# Altium PCB Drone_Powerv2.0.PcbDoc
Units mil, origin at the board's own origin, x right, y up, seen from the top; angles counter-clockwise.
Board outline 3110.24 x 2565.2 mil, 4 copper layers (Top Layer, GND, Power, Bottom Layer), stack 13.956 mil thick; 21 components, 14 nets, 86 pads, 0 vias.
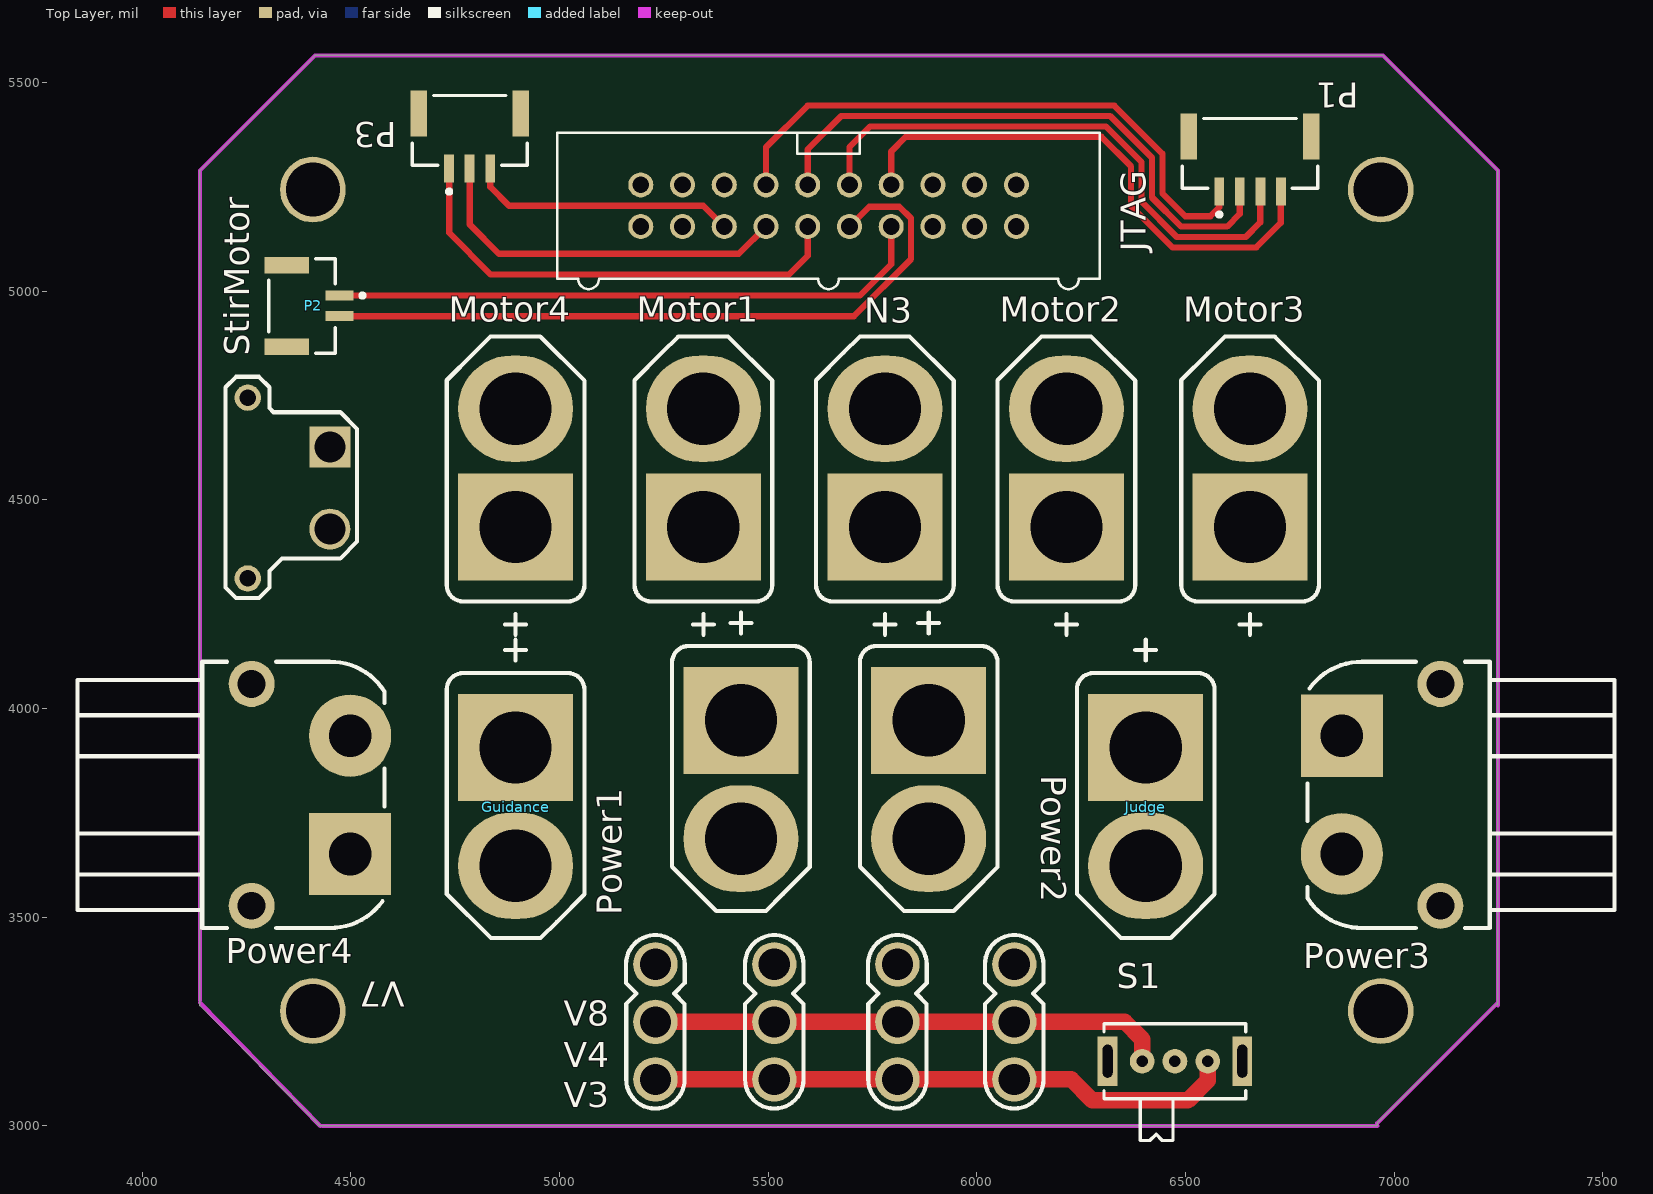
[diagram p0: Top Layer view]
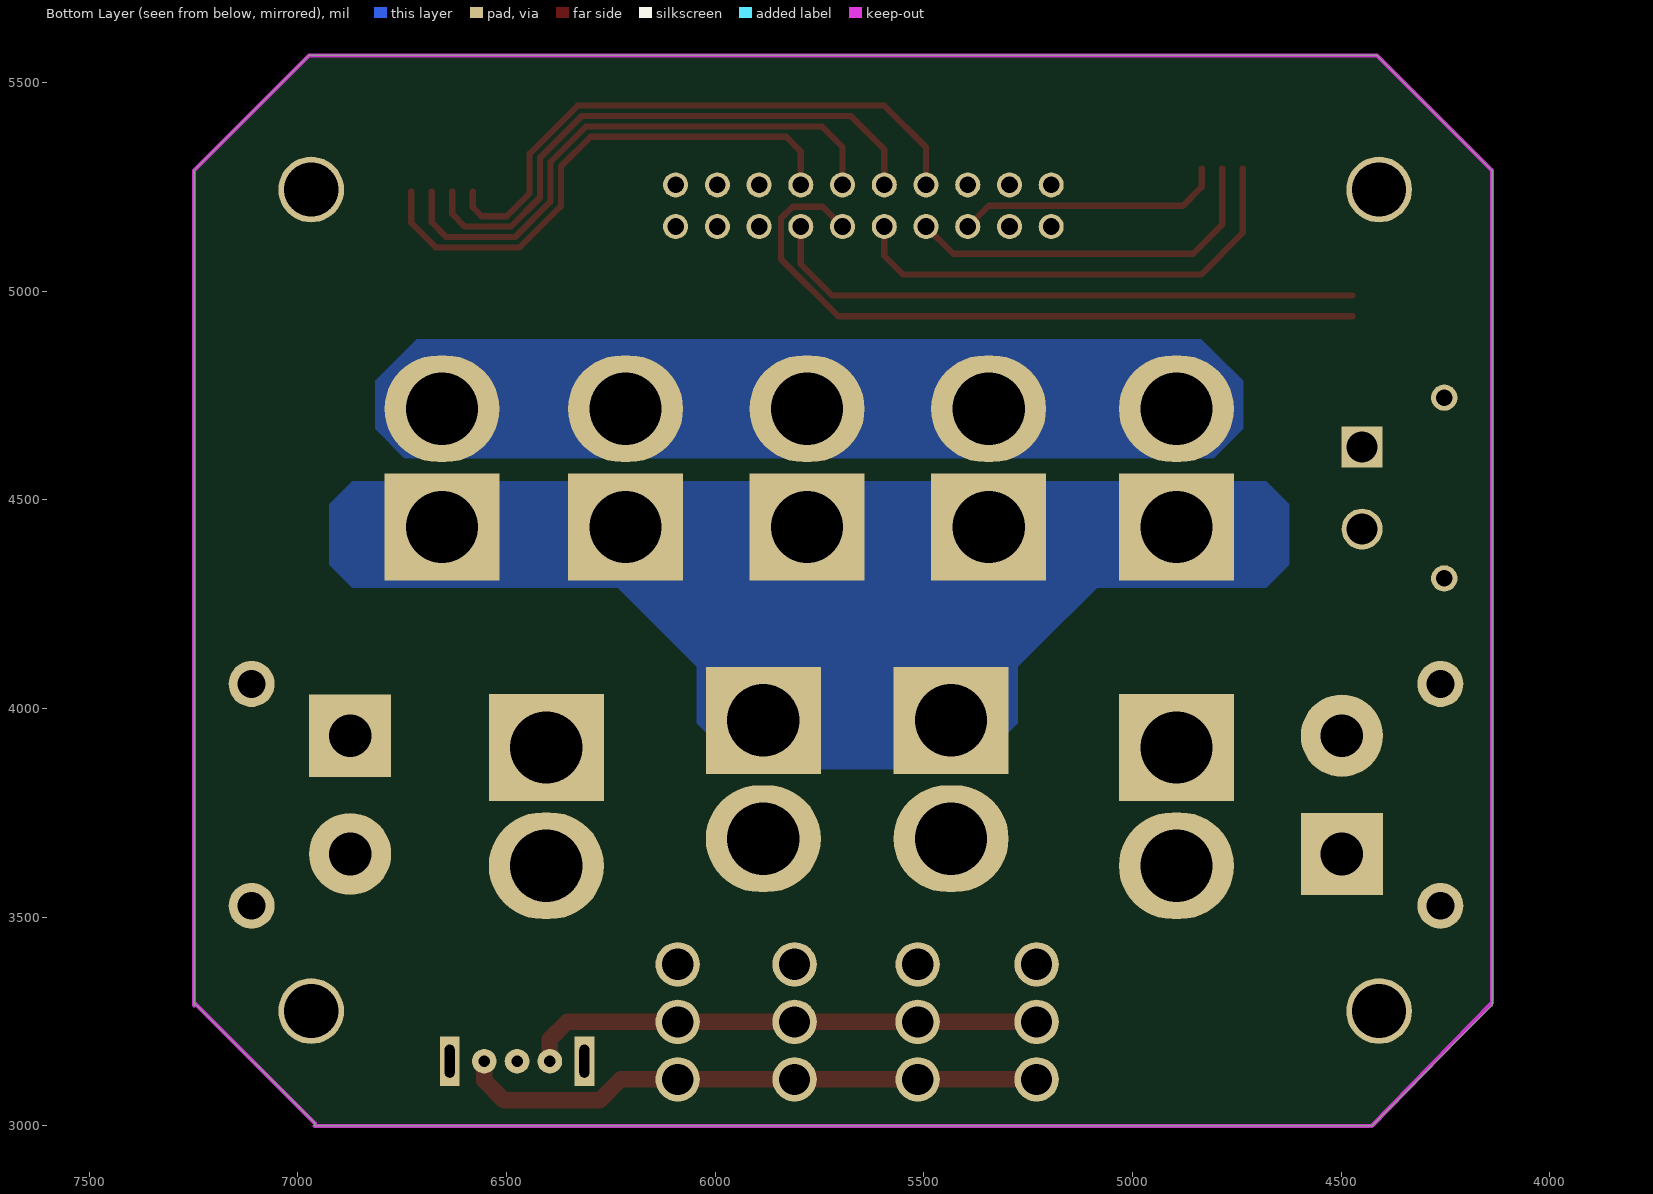
[diagram p1: Bottom Layer view, seen from below]
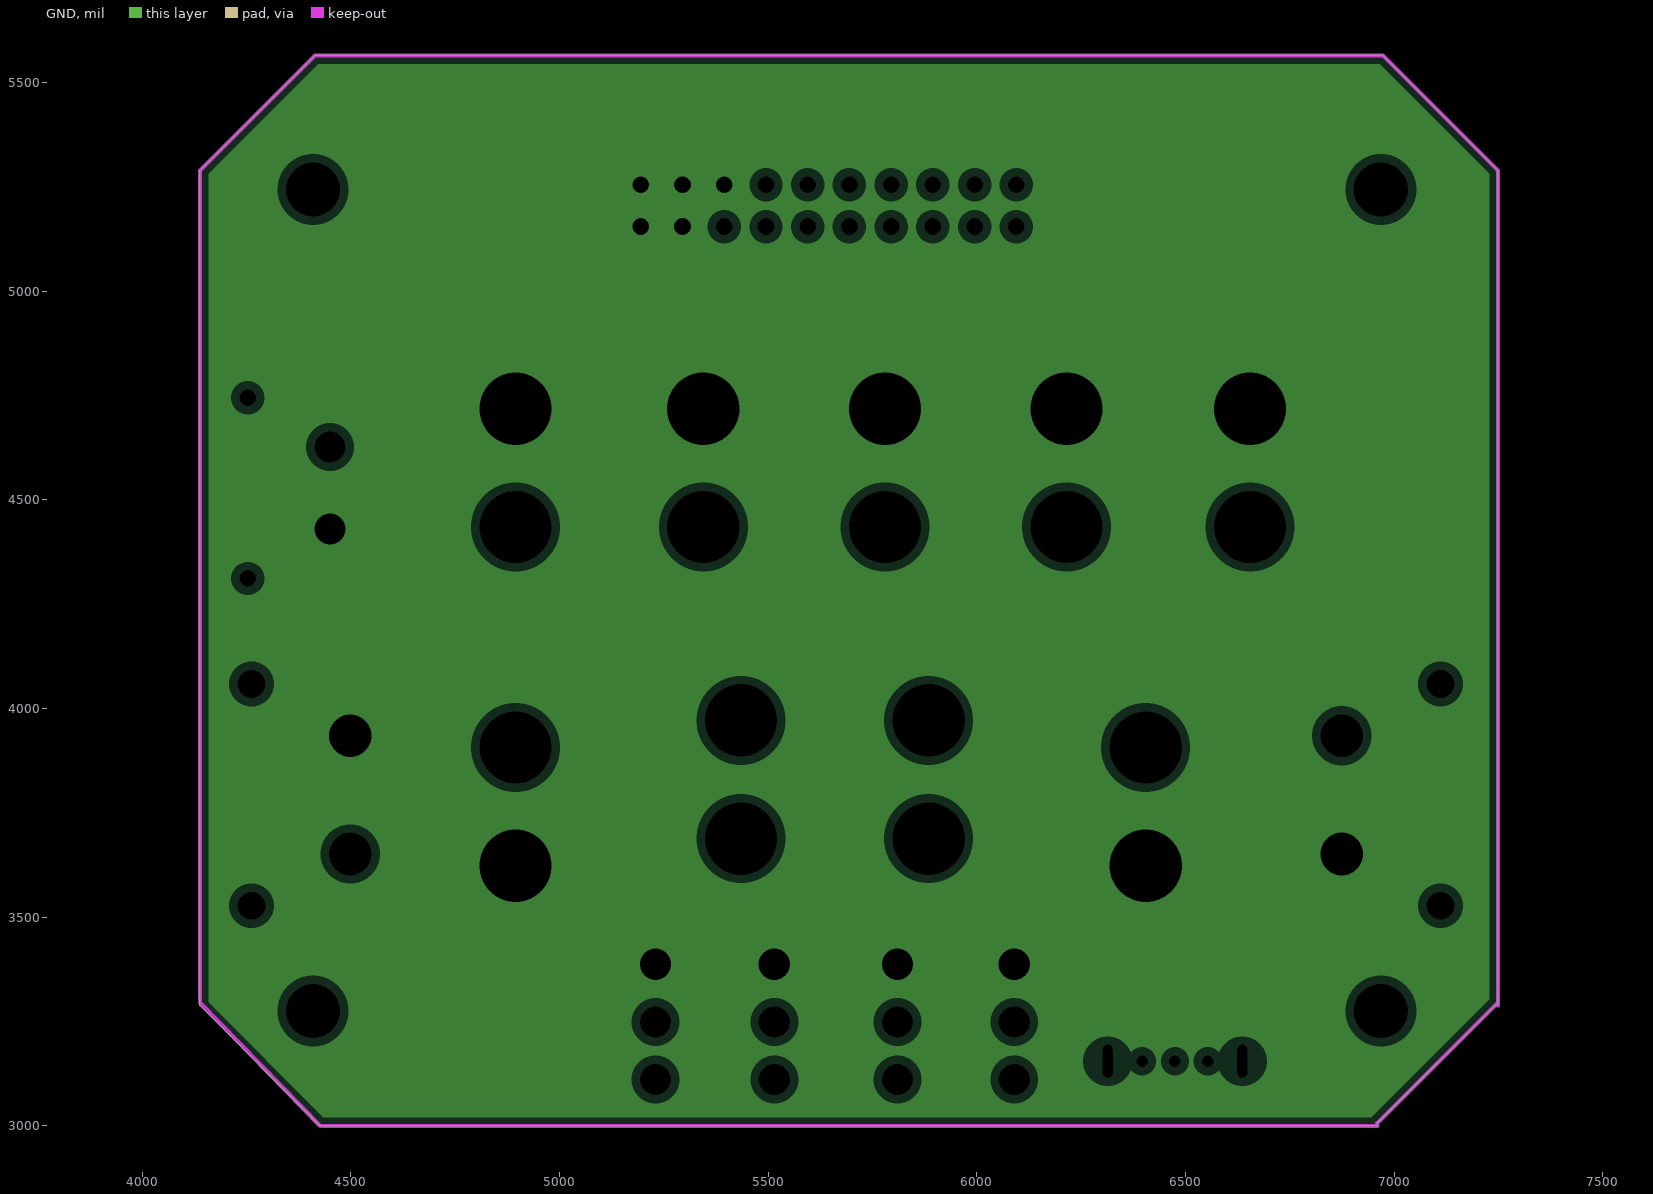
[diagram p2: GND, clearances drawn from the general rule]
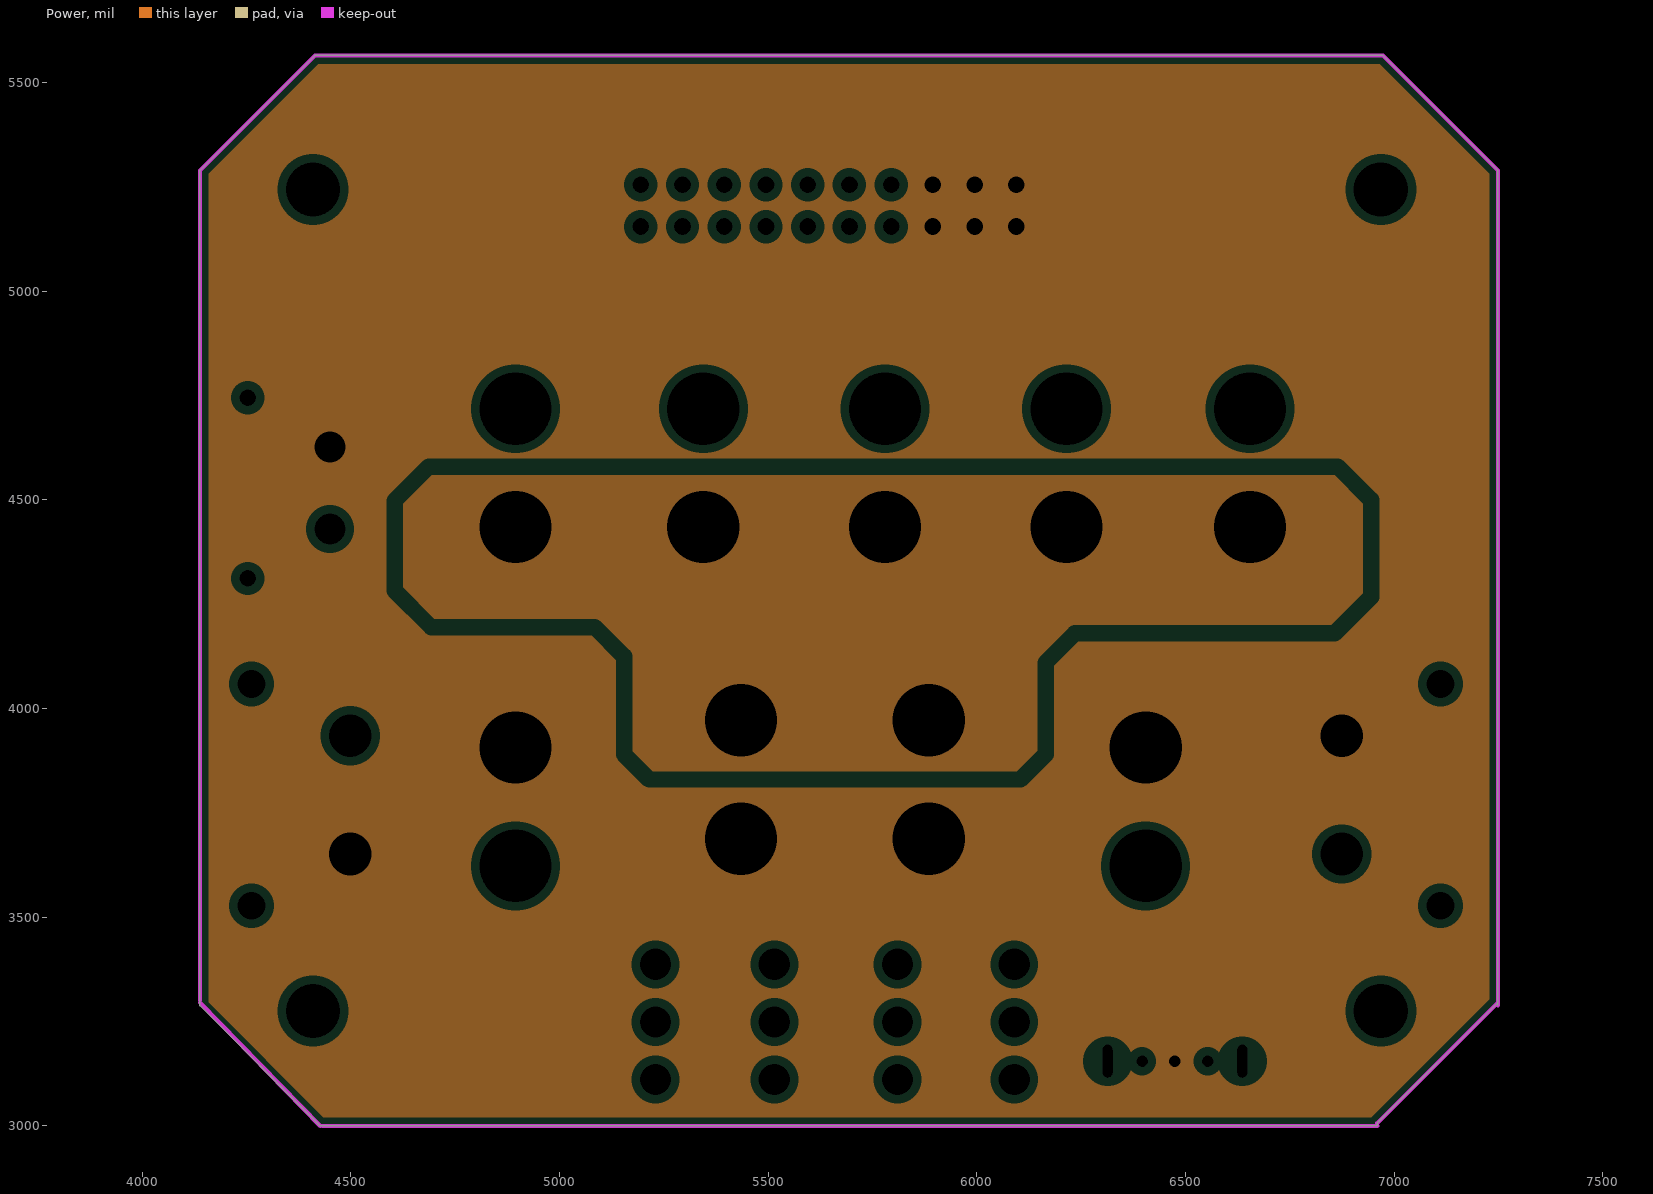
[diagram p3: Power, clearances drawn from the general rule]
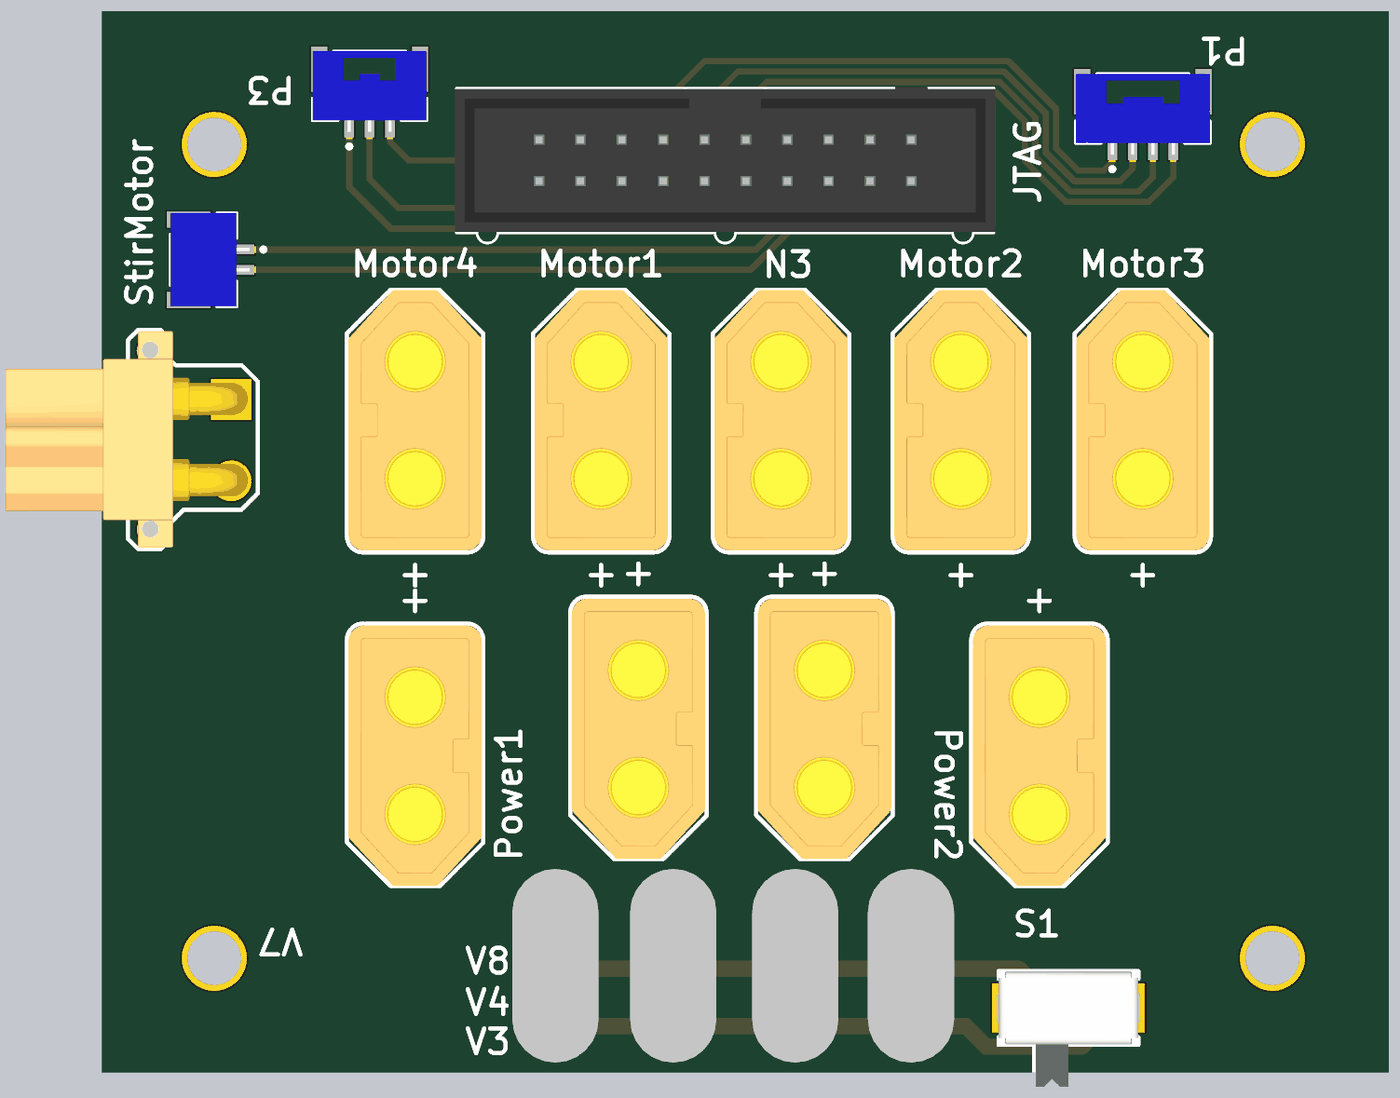
[diagram p4: 3D render of the assembled board from above, using the file's embedded part models]

## Layer stack, top to bottom
Top Layer: signal copper 1.4
Dielectric: prepreg 2.8, PP-006, Dk 4.1
GND: plane copper 1.3779, net GND
Dielectric: prepreg 2.8, PP-006, Dk 4.1
Power: plane copper 1.3779, net (Multiple Nets)
Dielectric: prepreg 2.8, PP-006, Dk 4.1
Bottom Layer: signal copper 1.4

## Board outline
7248.94,3295.65 6960,3006.71 6960,3000 4426.85,3000 4138.7,3288.15 4138.7,3295.65 4138.7,5289.61 4414.29,5565.2 6973.35,5565.2 7248.94,5289.61 7248.94,3288.94

## Design rules (kind name [scope] priority, off if disabled: settings)
Clearance [All] p1: gap=10
PlaneClearance [All] p1: clearance=20
PlaneConnect [All] p1: planeconnectstyle=Relief reliefexpansion=20 reliefentries=4 reliefconductorwidth=10 reliefairgap=10
PolygonConnect [All] p1: connectstyle=Direct reliefconductorwidth=10 reliefentries=4 polygonreliefangle="90 Angle" airgapwidth=10
RoutingVias [All] p1: holewidth=28 width=50 viastyle="Through Hole" minholewidth=28 minwidth=50 maxholewidth=28 maxwidth=50
SilkscreenOverComponentPads SilkToSolderMaskClearance [IsPad] p1: minsilkscreentomaskgap=10
SolderMaskExpansion [All] p1: expansion=4
Width [All] p1: maxlimit=196.85 minlimit=10 preferedwidth=10
25 further rules are at their usual default settings.

## Components (designator, comment, footprint, x,y, rotation, side; value= is the part's Value field where it differs from the comment)
Guidance "XT60" TX60UPB-F 4895,3765 r270 top
JTAG "JTAG" IDC20S 6095,5255 r270 top
Judge "XT60" TX60UPB-F 6405,3765 r270 top
Motor1 "XT60" TX60UPB-F 5345,4576.73 r90 top
Motor2 "XT60" TX60UPB-F 6215,4576.73 r90 top
Motor3 "XT60" TX60UPB-F 6655,4576.73 r90 top
Motor4 "XT60" TX60UPB-F 4895,4576.73 r90 top
N3 "XT60" TX60UPB-F 5780,4576.73 r90 top
P1 "JudgeComm" JST-BM04B-GHS-TBT_V 6655,5305 r0 top
P2 "Can" JST-SM02B-GHS-TB_V 4410,4965 r270 top
P3 "UART" JST-BM03B-GHS-TBT_V 4785,5360 r0 top
Power1 "XT60" TX60UPB-F 5435,3830 r270 top
Power2 "XT60" TX60UPB-F 5885,3830 r270 top
Power3 "XT60" TX60PW-F20 7528.54,3651.54 r90 top
Power4 "XT60" TX60PW-F20 3845,3935 r270 top
S1 "SS-12F23" SK-12D07VG3 6475,3155 r0 top
StirMotor "XT30" XT30PW-F30 4450,4430 r90 top (schematic designator V2)
V3 "MR30" MR30PB-F 5230,3387.09 r270 top
V4 "MR30" MR30PB-F 5515,3387.09 r270 top
V7 "MR30" MR30PB-F 5810,3387.09 r270 top
V8 "MR30" MR30PB-F 6090,3387.09 r270 top

## Footprints (in the part's own frame and the unit in brackets; to place one, negate y for a bottom-side part, rotate by r counter-clockwise, add the part's x,y. Pads: shape width x height; smd on the part's side, far side on the other; paste and mask are expansions set on the pad)
IDC20S [mil]
  round 60 hole 40: 1(0,0) 2(100,0) 3(0,-100) 4(100,-100) 5(0,-200) 6(100,-200) 7(0,-300) 8(100,-300) 9(0,-400) 10(100,-400) 11(0,-500) 12(100,-500) 13(0,-600) 14(100,-600) 15(0,-700) 16(100,-700) 17(0,-800) 18(100,-800) 19(0,-900) 20(100,-900)
  silkscreen extent -125,-1100 250,200, body extent -127,-1104 223,204, height 358
JST-BM03B-GHS-TBT_V [mm] "Connector, 3-Leads, Body 7.00x4.25mm, Pitch 1.25mm"
  rect 0.6x1.7 smd: 1(-1.25,-1.675) 2(0,-1.675) 3(1.25,-1.675)
  rect 1x2.8 smd: MP1(-3.1,1.675) MP2(3.1,1.675)
  silkscreen extent -3.5,-3.2 3.5,2.78, body extent -3.5,-2.17 3.5,2.78, height 4.21
JST-BM04B-GHS-TBT_V [mm] "Connector, 4-Leads, Body 8.25x4.25mm, Pitch 1.25mm"
  rect 0.6x1.7 smd: 1(-1.875,-1.675) 2(-0.625,-1.675) 3(0.625,-1.675) 4(1.875,-1.675)
  rect 1x2.8 smd: MP1(-3.725,1.675) MP2(3.725,1.675)
  silkscreen extent -4.13,-3.2 4.13,2.78, body extent -4.12,-2.17 4.13,2.78, height 4.2
JST-SM02B-GHS-TB_V [mm] "SMD, 2-Leads, Body 5.75x4.05mm, Pitch 1.25mm"
  rect 0.6x1.7 smd: 1(-0.625,1.6) 2(0.625,1.6)
  rect 1x2.7 smd: MP1(-2.475,-1.6) MP2(2.475,-1.6)
  silkscreen extent -2.88,-2.7 2.87,3.13, body extent -2.87,-2.7 2.88,2.15, height 4.35
MR30PB-F [mm]
  round 2.7 hole 1.9: 1(0,0) 2(3.5,0) 3(7,0)
  silkscreen extent -1.78,-1.79 8.78,1.78, body extent -2.65,-2.54 9.25,2.76, height 7.9
SK-12D07VG3 [mm]
  rect 1.2x3 hole 0.6 slot 2 at 90 deg unplated: 0(-4.1,0) 0(4.1,0)
  round 1.5 hole 0.7: 1(-2,0) 2(0,0) 3(2,0)
  silkscreen extent -4.32,-4.83 4.32,2.29, body extent -4.3,-4.85 4.3,2.25, height 4.75
TX60PW-F20 [mm]
  round 2.8 hole 1.7: 0(-3.15,10.6) 0(10.35,10.6)
  rect 5x5 hole 2.6: 1(7.2,16.6)
  round 5 hole 2.6: 2(0,16.6)
  silkscreen extent -4.5,0 11.7,18.7, body extent -4.4,0 11.6,18.62, height 8.65
TX60UPB-F [mm]
  rect 6.5x7 hole 4.4: 1(-3.6,0)
  oval 6.5x7 hole 4.4: 2(3.6,0)
  silkscreen extent -10.16,-4.19 8,4.19, body extent -8,-4.1 8,4.1, height 15.85
XT30PW-F30 [mm]
  round 1.6 hole 1: 0(-3,5) 0(8,5)
  rect 2.5x2.5 hole 1.9: 1(5,0)
  round 2.5 hole 1.9: 2(0,0)
  silkscreen extent -4.19,-1.65 9.27,6.35, body extent -4.11,-1.03 9.19,13.87, height 5.05

## Part data
P1: library part BM04B-GHS-TBT(LF)(SN), "GH Disconnectable Crimp Style Connector, Pitch 1.25 mm, 1 x 4 Position, Height 4.05 mm, -25 to 85 degC, RoHS, Tape and Reel"
P2: library part SM02B-GHS-TB(LF)(SN), "GH Disconnectable Crimp Style Connector, Pitch 1.25 mm, 1 x 2 Position, Height 4.25 mm, -25 to 85 degC, RoHS, Tape and Reel"
P3: library part BM03B-GHS-TBT(LF)(SN), "GH Disconnectable Crimp Style Connector, Pitch 1.25 mm, 1 x 3 Position, Height 4.05 mm, -25 to 85 degC, RoHS, Tape and Reel"

## Free pads (board coordinates)
  round 157.48 hole 129.92: 0(4409.29,3275.2) 0(4409.29,5243.7) 0(6968.35,3275.2) 0(6968.35,5243.7)

## Nets (pads, with @x,y where several pads share a name; then routed paths per layer and width w, separated by ;. In a path a pad name is that pad's centre, name@x,y a point inside that pad or via, vN(x,y) a via of type N, cw(c..) or ccw(c..) an arc to the next point about the centre after c; other vN are vias at no path point)
24V: Guidance.1 JTAG.1 JTAG.2 JTAG.3 JTAG.4 JTAG.5 JTAG.6 Judge.1 Power1.2 Power2.2 Power3.1 Power4.1 S1.2 StirMotor.1
48V: Motor1.1 Motor2.1 Motor3.1 Motor4.1 N3.1 Power1.1 Power2.1
BLUE: S1.3 V3.3 V4.3 V7.3 V8.3 | length 1410.6
  Top Layer w39.37: V3.3 6226.35,3111.5 6276.74,3061.11 6506.11,3061.11 6553.74,3108.74 S1.3
CAN_H: JTAG.8 P2.1 | length 1443.2
  Top Layer w15: P2.1 5719.61,4989.61 5795,5065 JTAG.8
CAN_L: JTAG.10 P2.2 | length 1702.4
  Top Layer w15: P2.2 5705.75,4940.39 5842.5,5077.14 5842.5,5174.68 5814.68,5202.5 5742.5,5202.5 JTAG.10
GND: Guidance.2 JTAG.15 JTAG.17 JTAG.18 JTAG.19 JTAG.20 Judge.2 Motor1.2 Motor2.2 Motor3.2 Motor4.2 N3.2 Power3.2 Power4.2 StirMotor.2 V3.1 V4.1 V7.1 V8.1
GROUND: JTAG.16 P3.3 | length 644.2
  Top Layer w15: P3.3 4834.21,5250 4879.21,5205 5345,5205 JTAG.16
LINE1: JTAG.13 P1.1 | length 1429.7
  Top Layer w15: JTAG.13 5495,5345 5595,5445 6330,5445 6445,5330 6445,5235 6500,5180 6560,5180 6581.18,5201.18 P1.1
LINE2: JTAG.11 P1.2 | length 1385.2
  Top Layer w15: JTAG.11 5595,5340 5675,5420 6319.64,5420 6420,5319.64 6420,5224.64 6489.64,5155 6600,5155 6630.39,5185.39 P1.2
LINE3: JTAG.9 P1.3 | length 1349.3
  Top Layer w15: JTAG.9 5695,5345 5745,5395 6309.29,5395 6395,5309.29 6395,5214.29 6479.29,5130 6644.61,5130 6679.61,5165 P1.3
LINE4: JTAG.7 P1.4 | length 1293.3
  Top Layer w15: JTAG.7 5795,5335 5830,5370 6298.93,5370 6370,5298.93 6370,5203.93 6468.93,5105 6670,5105 6728.82,5163.82 P1.4
RED: S1.1 V3.2 V4.2 V7.2 V8.2 | length 1236.4
  Top Layer w39.37: V3.2 6355,3249.29 6396.26,3208.03 S1.1
RX: JTAG.14 P3.2 | length 900
  Top Layer w15: P3.2 4785,5160 4855,5090 5430,5090 JTAG.14
TX: JTAG.12 P3.1 | length 1143.3
  Top Layer w15: P3.1 4735.79,5140 4835.79,5040 5550,5040 5595,5085 JTAG.12
pads on no net: P1.MP1 P1.MP2 P2.MP1 P2.MP2 P3.MP1 P3.MP2 Power3.0 Power4.0 S1.0 StirMotor.0

## Polygon pours and split planes (outlines as drawn)
GND on Bottom Layer "BottomLayerGND" (solid, pour order 8): 6815,4785 6745,4855 6600,4855 5880,4855 5870,4845 5880,4855 5835,4855 5620,4855 5185,4855 4805,4855 4735,4785 4735,4725 4735,4670 4805,4600 5025,4600 6680,4600 6745,4600 6815,4670 6815,4785
GND on Bottom Layer "BottomLayerGND" (solid, pour order 10): 6745,4855 6715,4885 6660,4885 6390,4885 6020,4885 5400,4885 4835,4885 4805,4855 4805,4845 5125,4845 5850,4845 6745,4845 6745,4855
48V on Bottom Layer "BottomLayer48V" (solid, pour order 18): 6870,4545 6925,4490 6925,4345 6870,4290 6700,4290 6505,4290 6000,4290 5535,4290 5050,4290 4680,4290 4625,4345 4625,4350 4625,4490 4680,4545 6870,4545
48V on Bottom Layer "BottomLayer48V" (solid, pour order 20): 6045,4100 6240,4295 6240,4340 5300,4340 5205,4340 5140,4340 5105,4340 5020,4340 5035,4340 5275,4100 5275,3965 5385,3855 5690,3855 5935,3855 6045,3965 6045,4100
48V on Bottom Solder "BottomSolder48V" (solid): 6870,4545 6925,4490 6925,4345 6870,4290 6540,4290 6235,4290 6045,4100 6045,3965 5935,3855 5730,3855 5385,3855 5275,3965 5275,4100 5085,4290 4680,4290 4625,4345 4625,4490 4680,4545 5110,4545 6870,4545
GND on Bottom Solder "BottomSolderGND" (solid): 6815,4670 6745,4600 6500,4600 5910,4600 5250,4600 4805,4600 4735,4670 4735,4785 4835,4885 4885,4885 6715,4885 6815,4785 6815,4670
GND on GND (split plane): 7228.84,5281.28 7228.84,3303.97 6945.79,3020.92 6945.11,3020.1 4435.18,3020.1 4158.8,3296.48 4158.8,5281.28 4422.61,5545.1 6965.02,5545.1
48V on Power (split plane): 6925.22,4491.81 6925.22,4275.58 6849.42,4199.78 6235,4199.78 6231.14,4199.4 6227.43,4198.27 6224.01,4196.45 6221.01,4193.99 6151.01,4123.99 6148.55,4120.99 6146.73,4117.57 6145.6,4113.86 6145.22,4110 6145.22,3898.19 6096.81,3849.78 5223.19,3849.78 5174.78,3898.19 5174.78,4125 5174.4,4128.86 5173.27,4132.57 5171.45,4135.99 5168.99,4138.99 5098.99,4208.99 5095.99,4211.45 5092.57,4213.27 5088.86,4214.4 5085,4214.78 4701,4214.78 4624.78,4291 4624.78,4475 4624.78,4490.02 4694.98,4560.22 6856.81,4560.22
24V on Power (split plane): 7228.84,5281.28 7228.84,3303.97 6945.79,3020.92 6945.11,3020.1 4435.18,3020.1 4158.8,3296.48 4158.8,5281.28 4422.61,5545.1 6965.02,5545.1

## Keep-outs
Keep-Out Layer:
  lines w10: 4138.7,3295.65 4426.85,3000 ; 4138.7,3301.3 4138.7,5289.61 4414.29,5565.2 6973.35,5565.2 7248.94,5289.61 7248.94,3288.94 ; 4432.5,3000 6960,3000 ; 6960,3006.71 7248.94,3295.65

## Other copper
Power (plane layer: these items are gaps in the copper):
  lines w39.37: 4605,4420 4605,4498.21 4686.79,4580 6865,4580 6945,4500 6945,4267.39 6857.61,4180 6235,4180 6165,4110 6165,3890 6105,3830 5215,3830 5155,3890 5155,4125 5085,4195 4692.8,4195 4605,4282.8 4605,4475

## Dimensions
4409.29,3275.2 to 4409.29,5243.7 on Mechanical 1
4409.29,5243.7 to 6968.35,5243.7 on Mechanical 1